# EAGLE board ERpcuk1 (EAGLE 7.7.0)
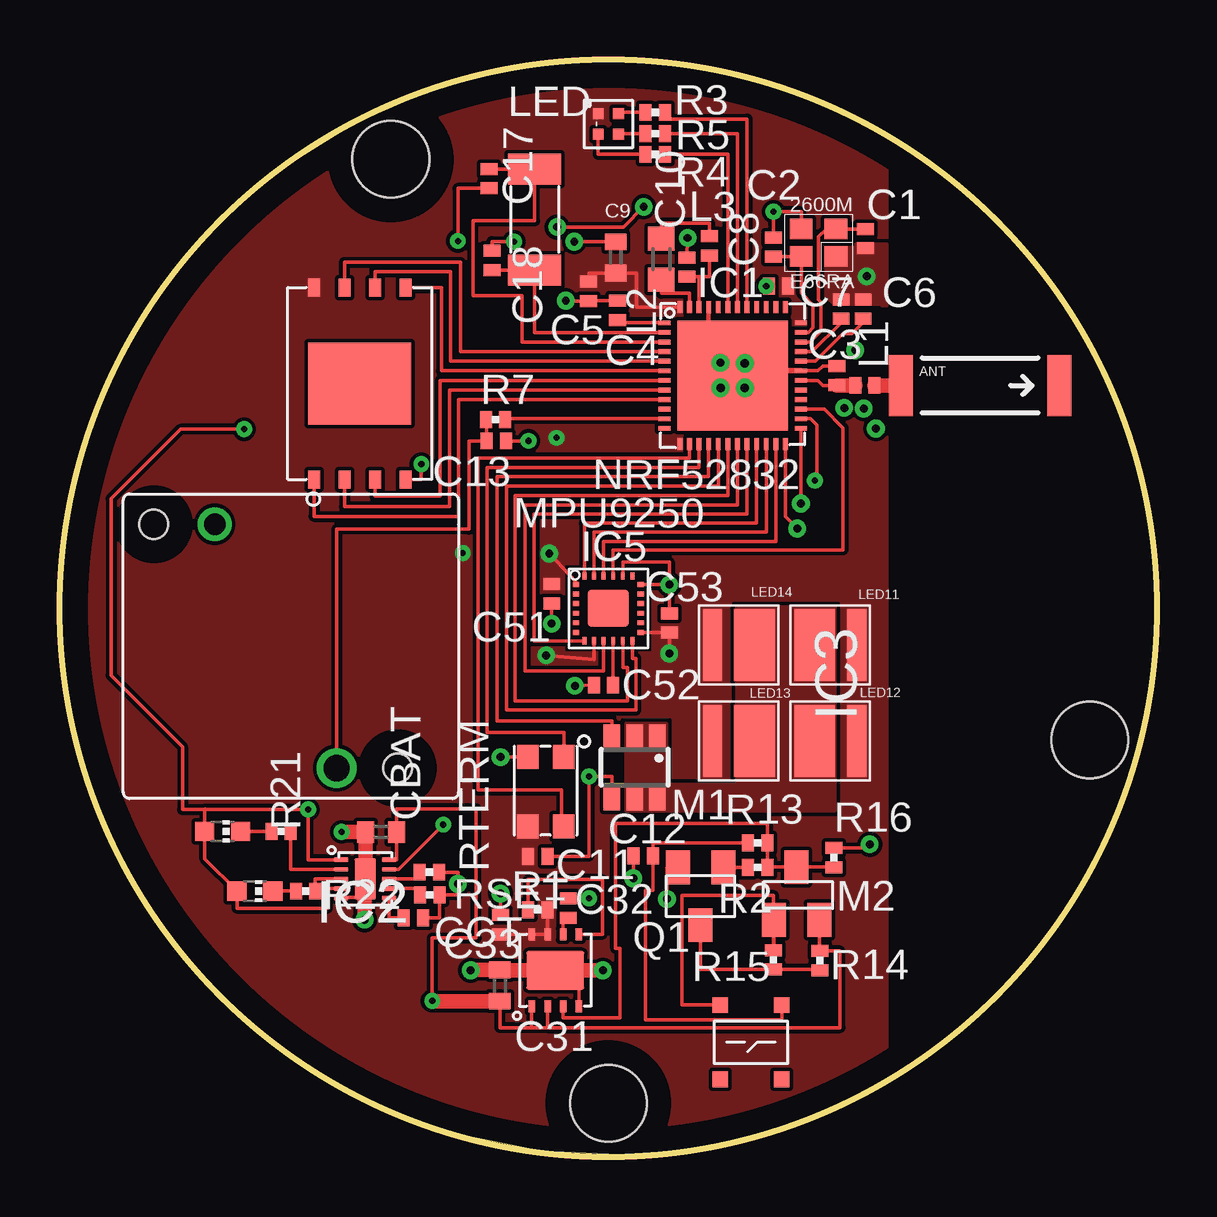
[diagram p0: board, top side]
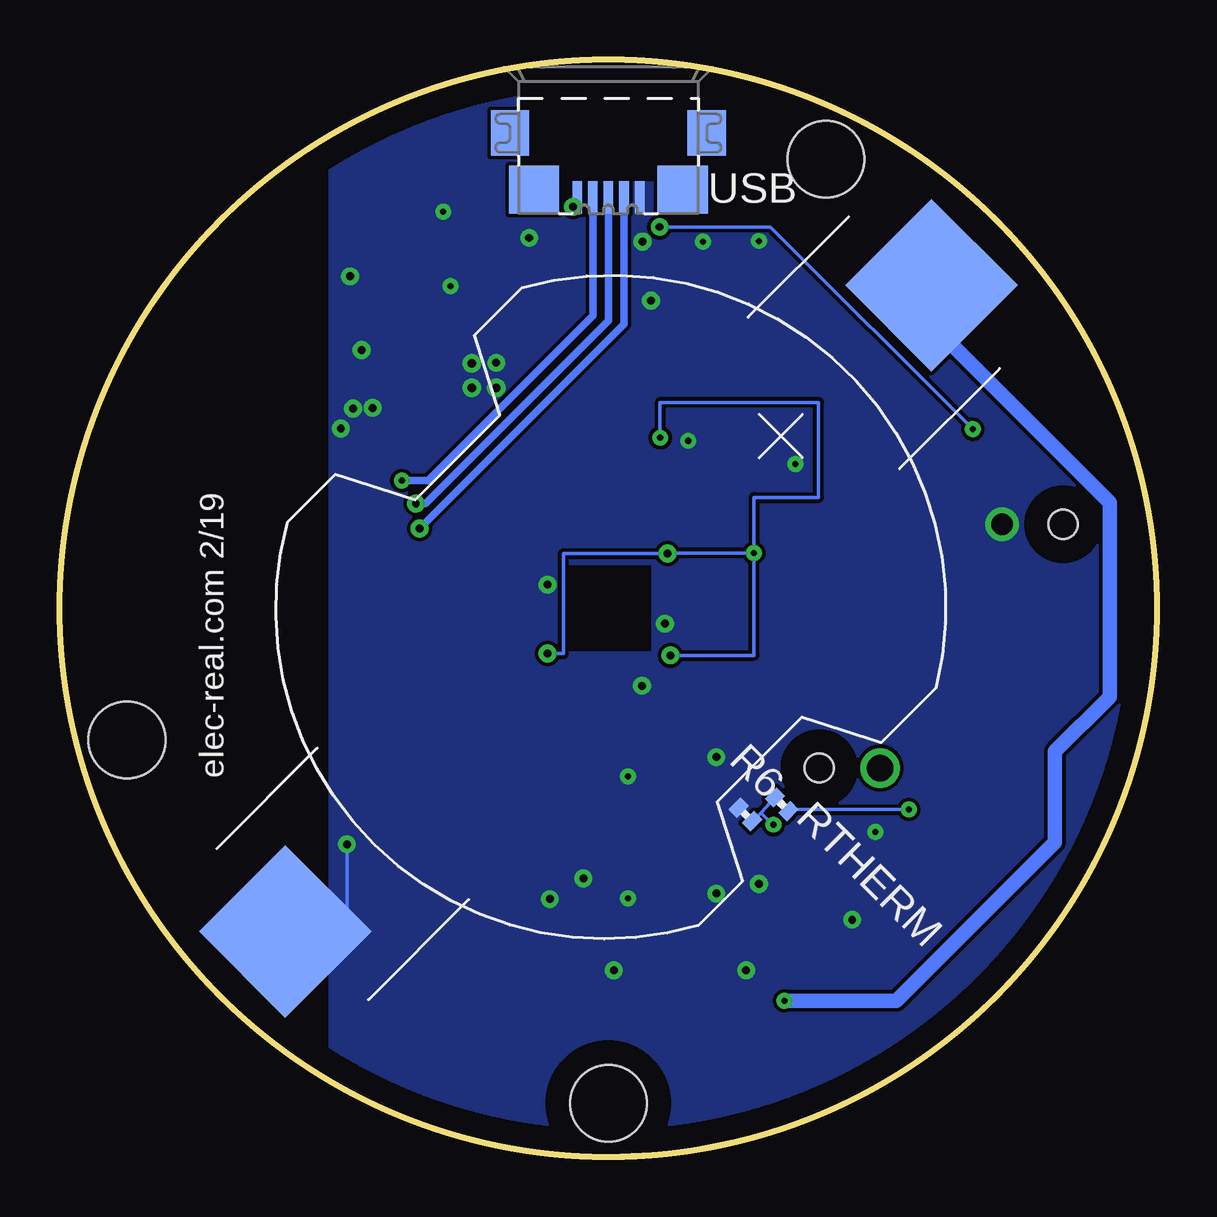
[diagram p1: board, bottom side, seen from below]

Size 45.72 x 45.72 mm. Coordinates in mm from the lower left corner, seen from the top.
Outline: circle at 22.86,22.86 radius 22.86
Copper layers (1*16): Top 0.035mm / dielectric 1.5mm / Bottom 0.035mm
Design rules "default *": minimum track width 6mil, minimum drill 10mil, track to track 6mil, track to pad 6mil, pad to pad 6mil, via to via 6mil, smd to smd 6mil, copper to edge 40mil, drill to drill 8mil, minimum pad ring 10mil, minimum via ring 8mil, stop-mask expansion 2mil, vias tented up to drill 0mil, thermal gap 10mil
Holes 3.2 mm at 13.79,41.58 42.93,17.37 22.86,2.24
Milling: 48 lines

## Footprints (pad centres in the part's own frame; a part is rotated, then mirrored left to right if it is on the bottom)
ANTENNA-CHIP5 = smd 1.016 x 2.54: FEED -3.302,0; NC 3.302,0
C0201 = smd 0.5 x 0.7: 1 -0.4,0; 2 0.4,0
C0402 = smd 0.7 x 0.9: 1 -0.65,0; 2 0.65,0
QFN48 = smd 0.5 x 0.2: 1 -2.85,2.2; 2 -2.85,1.8; 3 -2.85,1.4; 4 -2.85,1; 5 -2.85,0.6; 6 -2.85,0.2; 7 -2.85,-0.2; 8 -2.85,-0.6; 9 -2.85,-1; 10 -2.85,-1.4; 11 -2.85,-1.8; 12 -2.85,-2.2; 25 2.85,-2.2; 26 2.85,-1.8; 27 2.85,-1.4; 28 2.85,-1; 29 2.85,-0.6; 30 2.85,-0.2; 31 2.85,0.2; 32 2.85,0.6; 33 2.85,1; 34 2.85,1.4; 35 2.85,1.8; 36 2.85,2.2 | smd 0.2 x 0.5: 13 -2.2,-2.85; 14 -1.8,-2.85; 15 -1.4,-2.85; 16 -1,-2.85; 17 -0.6,-2.85; 18 -0.2,-2.85; 19 0.2,-2.85; 20 0.6,-2.85; 21 1,-2.85; 22 1.4,-2.85; 23 1.8,-2.85; 24 2.2,-2.85; 37 2.2,2.85; 38 1.8,2.85; 39 1.4,2.85; 40 1,2.85; 41 0.6,2.85; 42 0.2,2.85; 43 -0.2,2.85; 44 -0.6,2.85; 45 -1,2.85; 46 -1.4,2.85; 47 -1.8,2.85; 48 -2.2,2.85 | smd 4.6 x 4.6: 49 0,0
AAT3693 = smd 0.6 x 0.2: 1 -1,0.8; 2 -1,0.4; 3 -1,0; 4 -1,-0.4; 5 -1,-0.8; 6 1,-0.8; 7 1,-0.4; 8 1,0; 9 1,0.4; 10 1,0.8 | smd 0.9 x 1.7: EP 0,0
DFN8-3X3 = smd 0.5 x 0.3: 1 -1.5,0.975; 2 -1.5,0.325; 3 -1.5,-0.325; 4 -1.5,-0.975; 5 1.5,-0.975; 6 1.5,-0.325; 7 1.5,0.325; 8 1.5,0.975 | smd 1.6 x 2.4: EP 0,0
T4 = smd 1 x 0.9: 1 -1.45,0.75; 2 -1.45,-0.75; 3 1.45,-0.75; 4 1.45,0.75
3X3_24_QFN_CORRECTED = smd 0.3 x 0.2: 1 -1.35,1; 2 -1.35,0.6; 3 -1.35,0.2; 4 -1.35,-0.2; 5 -1.35,-0.6; 6 -1.35,-1; 13 1.35,-1; 14 1.35,-0.6; 15 1.35,-0.2; 16 1.35,0.2; 17 1.35,0.6; 18 1.35,1 | smd 0.2 x 0.3: 7 -1,-1.35; 8 -0.6,-1.35; 9 -0.2,-1.35; 10 0.2,-1.35; 11 0.6,-1.35; 12 1,-1.35; 19 1,1.35; 20 0.6,1.35; 21 0.2,1.35; 22 -0.2,1.35; 23 -0.6,1.35; 24 -1,1.35 | smd 1.7 x 1.54: P$2 0,0
R0603 = smd 1 x 1.1: 1 -0.85,0; 2 0.85,0
1X1 = smd 0.45 x 0.45: A 0.425,0.425; B -0.425,-0.425; G -0.425,0.425; R 0.425,-0.425
CHIP-LED0603 = smd 0.8 x 0.8: A 0,-0.75; C 0,0.75
XH-G = smd 1.7 x 3: 1 -0.65,0 | smd 0.8 x 3: 2 1.1,0
SSOT6 = smd 0.69 x 0.99: 1 -0.95,-1.3; 2 0,-1.3; 3 0.95,-1.3; 4 0.95,1.3; 5 0,1.3; 6 -0.95,1.3
SOT23 = smd 1 x 1.4: 1 -0.95,-1.1; 2 0.95,-1.1; 3 0,1.1
SC59-BEC = smd 1 x 1.4: B -0.95,-1.2; C 0,1.2; E 0.95,-1.2
R0201 = smd 0.5 x 0.7: 1 -0.4,0; 2 0.4,0
TL3312 = smd 0.66 x 0.635: 1 -1.549,1.28; 2 1.549,1.28; 3 -1.549,-1.28; 4 1.549,-1.28
8WSON6X8 = smd 0.75 x 0.5: 1 -4,1.905; 2 -4,0.635; 3 -4,-0.635; 4 -4,-1.905; 5 4,-1.905; 6 4,-0.635; 7 4,0.635; 8 4,1.905 | smd 3.404 x 4.293: EP 0,0
MD = drill 0.9: P$1 -5.08,-2.54 | drill 1.1: P$2 5.08,2.54 | hole 1.2: -5.08,-5.08; 5.08,5.08
LIR2450 = smd 5.08 x 5.08: 1 -19.05,0; 2 19.05,0
ZX62R-B-5P = smd 1.35 x 0.4: 1 2.675,1.3; 2 2.675,0.65; 3 2.675,0; 4 2.675,-0.65; 5 2.675,-1.3 | smd 1.9 x 1.6: M1 0,-4.1; M2 0,4.1 | smd 2 x 2.1: M3 2.35,3.1; M4 2.35,-3.1
FA-128 = smd 0.95 x 0.85: 1 -0.725,-0.575; 2 0.725,-0.575; 3 0.725,0.575; 4 -0.725,0.575
ECX39 = smd 1.3 x 2.2: P$1 -2.1,0; P$2 2.1,0

## Placement (x,y rotation side)
ANT  ANTENNA2SMD5  [ANTENNA-CHIP5]  38.35,32.16 0 top
C1  20pF  [C0201]  33.58,38.28 90 top
C2  20pF  [C0201]  29.74,37.92 270 top
C3  .8pF  [C0201]  32.38,32.56 270 top
C4  100nF  [C0201]  23.24,35.28 270 top
C5  100nF  [C0201]  22.03,36.07 90 top
C6  [C0201]  33.48,35.33 270 top
C7  100pF  [C0201]  32.56,35.33 270 top
C8  100nF  [C0201]  29.95,36.3 0 top
C9  4.7uF  [C0402]  23.16,37.49 270 top
C10  1.0uF  [C0201]  26.14,37.08 270 top
C11  0.1uF  [C0201]  19.91,12.52 180 top
C12  330nF  [C0201]  24.31,12.54 0 top
C13  [C0201]  18.19,29.84 180 top
C17  [C0201]  17.88,40.77 90 top
C18  [C0201]  18.01,37.36 270 top
C31  4.7UF  [C0402]  18.34,7.14 270 top
C32  1.0nF  [C0201]  21.18,10.36 270 top
C33  1.0uF  [C0201]  18.36,9.68 270 top
C51  10nF  [C0201]  20.5,23.47 90 top
C52  .1uF  [C0201]  22.66,19.66 0 top
C53  .1uF  [C0201]  25.4,22.25 270 top
CBAT  4.7uF  [C0402]  13.39,13.54 0 top
CCT  0.1uF  [C0201]  14.73,9.96 180 top
IC1  NRF52832  [QFN48]  28.04,32.56 0 top
IC2  AAT3693  [AAT3693]  12.73,11.58 0 top
IC3  MCP1727  [DFN8-3X3]  20.65,7.77 90 top
IC4  TSL238T  [T4]  20.24,15.21 270 top
IC5  MPU9250  [3X3_24_QFN_CORRECTED]  22.86,22.86 0 top
L1  3.9nH  [C0201]  33.55,32.16 0 top
L2  10uH  [R0603]  25.07,37.41 90 top
L3  15nH  [C0201]  27.08,37.97 270 top
LED  1X1RGB  [1X1]  22.86,43.05 90 top
LED1  [CHIP-LED0603]  6.78,13.56 270 top
LED2  [CHIP-LED0603]  8.13,11.07 270 top
LED11  XH-G  [XH-G]  32.11,21.33 0 top
LED12  XH-G  [XH-G]  32.11,17.33 0 top
LED13  XH-G  [XH-G]  28.3,17.33 180 top
LED14  XH-G  [XH-G]  28.3,21.33 180 top
M1  FDC2512  [SSOT6]  23.95,16.23 180 top
M2  BSH201  [SOT23]  30.7,10.98 0 top
Q1  SC2412  [SC59-BEC]  26.7,10.87 180 top
R1  100  [R0201]  19.91,10.29 180 top
R2  100k  [R0201]  29.08,12.06 180 top
R3  100  [R0201]  24.82,43.54 180 top
R4  100  [R0201]  24.82,41.78 180 top
R5  100  [R0201]  24.82,42.65 180 top
R6  10k  [R0201]  15.64,14.7 315 bottom
R7  R-ER0201  [R0201]  18.16,30.73 0 top
R13  1M  [R0201]  29.08,13.08 180 top
R14  10k  [R0201]  31.67,8.18 270 top
R15  10k  [R0201]  29.74,8.2 90 top
R16  10k  [R0201]  32.26,12.47 90 top
R21  1k5  [R0201]  9.22,13.56 0 top
R22  1k5  [R0201]  10.24,11.07 0 top
RSET  16k5  [R0201]  15.42,10.92 180 top
RTERM  R-ER0201  [R0201]  15.39,11.86 180 top
RTHERM  10k  [R0201]  17.15,14.27 315 bottom
SW1  TL3312  [TL3312]  28.8,4.78 270 top
U$1  W25N01GV  [8WSON6X8]  12.5,32.23 90 top
U$3  MD  [MD]  8.99,21.29 270 top
U$4  MPD-LIR2450  [LIR2450]  22.86,22.86 45 bottom
USB  Uusb  [ZX62R-B-5P]  22.86,42.67 270 bottom
X1  [FA-128]  31.62,38.1 0 top
X2  ECX32  [ECX39]  19.79,39.07 270 top

## Library data of the parts
ANT = SparkFun
C1-C13 C17 C18 C31-C33 C51-C53 CBAT CCT L1-L3 R1-R7 R13-R16 R21 R22 RSET RTERM RTHERM = rcl
IC1 = Nordic
IC2 = skyworks
IC3 = microchip
IC4 = AMS
IC5 = invensense
LED LED1 LED2 LED11-LED14 = led
M1 M2 = transistor-fet
Q1 = transistor-npn
SW1 = switch-omron; DIGIKEY: EG4620CT-ND
U$1 = st-microelectronics
U$3 = switch-omron; DIGIKEY: 401-1932-ND
U$4 = battery
USB = con-hirose
X1 = crystal; MAN: FA-128 SiekoEpson
X2 = crystal

## Nets
3V3: C5.2 C8.2 C9.2 C11.2 C33.2 C51.2 C53.2 IC1.13 IC1.36 IC1.48 IC3.7 IC3.8 IC4.3 IC5.1 IC5.8 IC5.13 LED11.2 LED12.2 LED13.2 LED14.2 LED.A R1.1 U$1.8
BLUE: IC1.42 R5.1
GND: C1.1 C2.1 C3.1 C4.1 C5.1 C6.1 C7.1 C8.1 C9.1 C10.1 C11.1 C12.1 C13.1 C17.1 C18.1 C31.1 C32.1 C33.1 C51.1 C52.1 C53.1 CBAT.1 CCT.1 IC1.31 IC1.45 IC1.49 IC2.5 IC2.EP IC3.4 IC3.EP IC4.2 IC5.18 IC5.20 M1.4 Q1.E R16.2 RSET.1 RTERM.1 RTHERM.1 U$1.4 U$3.P$1 U$4.1 USB.1 X1.2 X1.4
GREEN: IC1.43 R4.1
LT_INTENSITY: IC1.14 IC4.4
N$2: LED11.1 LED12.1 LED13.1 LED14.1 M1.1 M1.2 M1.5 M1.6
N$3: Q1.B R2.2
N$4: C3.2 IC1.30 L1.1
N$5: C6.2 IC1.32
N$6: ANT.FEED L1.2
N$7: C7.2 IC1.33
N$8: C1.2 IC1.34 X1.3
N$9: C2.2 IC1.35 X1.1
N$10: Q1.C R14.2 R15.1
N$11: IC1.47 L2.1
N$12: L2.2 L3.1
N$13: C10.2 IC1.46 L3.2
N$15: C12.2 R13.2 SW1.1
N$16: LED.B R5.2
N$17: CCT.2 IC2.6
N$18: IC2.7 RSET.2
N$19: IC2.8 RTERM.2
N$20: IC2.3 R22.2
N$21: IC2.2 R21.2
N$22: LED1.C R21.1
N$23: LED2.C R22.1
N$24: LED.G R4.2
N$25: IC3.5 R1.2
N$26: LED.R R3.2
N$27: C32.2 IC3.6
N$28: M2.1 R15.2 SW1.3
N$31: C18.2 IC1.2 X2.P$2
N$32: C17.2 IC1.3 X2.P$1
N$33: C52.2 IC5.10
N$34: C13.2 R7.1 U$3.P$2
N$36: C4.2 IC1.1
OE: IC1.15 IC4.1
P2: IC1.4 U$1.7
P3: IC1.5 U$1.6
P4: IC1.6 U$1.5
P5: IC1.7 U$1.3
P6: IC1.8 U$1.2
P7: IC1.9 U$1.1
P9: IC1.11 R7.2
P10: IC1.12
P14: IC1.17 IC5.12
P15: IC1.18 IC5.11
P16: IC1.19 IC5.9
P17: IC1.20 IC5.7
P18: IC1.21 IC5.24
P19: IC1.22 IC5.23
P20: IC1.23 IC5.22
P22: IC1.27 IC5.21
P23: IC1.28
P24: IC1.29
P25: IC1.37
P26: IC1.38
P27: IC1.39
P28: IC1.40
PWM: IC1.16 M1.3
RED: IC1.41 R3.1
RST: IC1.24 USB.2
SWDCLK: IC1.25 USB.3
SWDIO: IC1.26 USB.4
TS: IC2.9 R6.1 RTHERM.2
VBAT: C31.2 CBAT.2 IC2.10 IC3.1 IC3.2 M2.2 R14.1 U$4.2
VON: IC3.3 M2.3 R2.1 R13.1 R16.1
VUSB: IC2.1 IC2.4 LED1.A LED2.A R6.2 USB.5

## Tracks (layer width: path | path; a pad name or v marks a point on that pad's centre or on a via)
3V3  (via drill 0.25, 0.33)
  Top 0.152: R1.1 20.32,10.29 IC3.7 IC3.8 C33.2 | IC1.48 24.03,35.41 24.03,36.83 C9.2 22.05,36.84 C5.2 | IC5.1 21.51,23.96 v20.4,25.15 | v25.4,20.98 C53.2 IC5.13 | IC5.8 22.26,20.73 v20.27,20.9
  Bottom 0.152: v20.27,20.9 16.79,20.9 v16.79,25.17 | v25.4,20.98 24.74,20.98 24.74,25.15 v20.4,25.15 20.4,25.17 v16.79,25.17 | v20.7,29.97 20.7,31.45 14.1,31.45 14.1,27.48 16.79,27.48 v16.79,25.17
  pour Top (rank 2, no thermals): 0,0 45.72,0 45.72,45.72 0,45.72
BLUE
  Top 0.152: IC1.42 28.24,42.65 R5.1
GND  (via drill 0.25, 0.33, 0.34, 0.36)
  Top 0.152: IC1.31 31.59,32.76 31.8,32.97 C3.1 | IC3.4 21.62,7.77 22.1,7.77 | C33.1 v18.36,10.97 | IC2.5 11.72,10.82 12.7,10.82 | RTERM.1 16.59,11.86 v16.59,11.38 16.59,10.92 RSET.1 15.82,9.96 CCT.1 | C12.1 v23.9,11.61 | Q1.E 25.3,12.06 v25.3,10.74 | C52.1 v21.46,19.63 | C51.1 v20.5,22.23 | C53.1 v25.4,23.85 | v25.4,23.85 v25.4,23.86 | v25.4,23.85 25.4,24.79 23.46,24.79 IC5.20 | R16.2 33.6,12.87 v33.76,13.03 | C9.1 23.15,38.15 v21.44,38.15 | C4.1 C5.1 21.18,35.67 v21.08,35.69 | C10.1 v26.16,38.3 | IC5.18 v25.4,23.85 | 28.04,33.07 IC1.49 | IC4.2 v18.36,16.66 | X1.4 30.9,39.4 v29.74,39.4 C2.1 | M1.4 23,15.85 v22.05,15.85 22.05,12.52 C11.1 | C32.1 v22.05,10.77 22.02,10.74 | C8.1 v29.44,36.3 | C18.1 18.01,38.15 v18.92,38.15 | C17.1 16.59,40.37 v16.59,38.18 | U$1.4 15.06,28.23 v15.06,28.88 | C13.1 v19.53,29.84
  Top 0.178: 28.55,32.76 v28.55,33.07 28.04,33.07 | IC1.45 27.04,33.59 v27.53,33.1 | 12.7,9.84 IC2.EP
  Top 0.22: IC1.31 28.86,32.76 arc-90 v28.55,33.07
  Top 0.61: 17.14,7.79 C31.1 arc90 18.35,7.77 IC3.EP 22.1,7.77 v22.63,7.77 | 12.7,9.84 12.7,10.82 | v11.73,13.54 CBAT.1 IC2.EP
  Bottom 0.152: U$4.1 36.33,10.11 33.76,10.11 v33.76,13.03
  other vias: 27.53,32.05 28.55,32.05 17.12,7.77 12.7,9.88 33.15,33.63 33.5,31.19 34.01,30.35 32.69,31.22 33.63,36.7
  pour Bottom (no thermals): 0,0 45.72,0 45.72,45.72 0,45.72
  pour Top (no thermals): 34.26,35.48 34.47,35.48 34.47,38.05 33.17,38.05 33.17,37.97 33.17,37.9 31.93,37.9 31.93,35.86 32.26,35.53 34.21,35.53
GREEN
  Top 0.152: IC1.43 27.84,41.78 R4.1
LT_INTENSITY
  Top 0.152: IC1.14 26.24,29.13 17.42,29.13 17.42,15.29 20.9,15.29 20.9,13.77 IC4.4
N$1
  cutout Top: 47.5,41.15 47.5,4.57 34.54,4.57 34.54,41.15
N$2
  pour Top (no thermals): 23.6,18.03 23.6,14.43 31.6,14.43 32.31,14.43 32.31,22.91 28.22,22.91 28.22,15.52 25.27,15.52 25.27,17.98 25.27,18.06 23.6,18.06
N$3
  Top 0.152: Q1.B | Q1.B R2.2
N$4
  Top 0.152: IC1.30 31.59,32.36 31.8,32.16 C3.2
  Top 0.61: C3.2 L1.1
N$5
  Top 0.152: IC1.32 31.49,33.16 32.64,34.31 33.02,34.31 33.48,34.77 C6.2
N$6
  Top 0.61: L1.2 ANT.FEED
N$7
  Top 0.152: IC1.33 31.35,33.56 32.56,34.77 C7.2
N$8
  Top 0.152: IC1.34 31.27,33.96 31.73,34.42 31.73,35.64 31.62,35.74 31.62,38.35 31.94,38.67 X1.3 C1.2
N$9
  Top 0.152: IC1.35 31.19,34.36 31.39,34.57 31.39,35.51 30.91,35.99 30.91,37.51 X1.1 C2.2
N$10
  Top 0.152: R14.2 31.67,7.8 R15.1 26.7,7.8 Q1.C
N$11
  Top 0.152: IC1.47 26.24,35.99 25.07,35.99 L2.1
N$12
  Top 0.152: L3.1 27.08,38.91 25.07,38.91 L2.2
N$13
  Top 0.152: IC1.46 26.64,36.68 | 26.64,36.68 C10.2 | L3.2 27.08,36.68 26.64,36.68
N$14
  cutout Bottom: 47.5,41.15 47.5,4.57 34.54,4.57 34.54,41.15
N$15
  Top 0.152: R13.2 24.71,13.08 C12.2 24.71,11.1 24.41,11.1 24.41,5.71 24.71,5.71 25.07,5.71 30.08,5.71 SW1.1
N$16
  Top 0.152: LED.B 23.29,42.65 R5.2
N$17
  Top 0.152: IC2.6 13.72,9.96 CCT.2
N$18
  Top 0.152: IC2.7 14.99,11.18 RSET.2
N$19
  Top 0.152: IC2.8 14.99,11.58 RTERM.2
N$20
  Top 0.152: IC2.3 10.64,11.58 R22.2
N$21
  Top 0.152: IC2.2 9.62,11.98 R21.2
N$22
  Top 0.152: R21.1 LED1.C
N$23
  Top 0.152: R22.1 LED2.C
N$24
  Top 0.152: LED.G 22.43,41.78 R4.2
  Top 0.178: LED.G 22.42,42.63
N$25
  Top 0.152: IC3.5 22.61,9.27 22.61,11.56 19.51,11.56 R1.2
N$26
  Top 0.152: LED.R 23.34,43.54 R3.2
N$27
  Top 0.152: IC3.6 20.98,9.96 C32.2
N$28
  Top 0.152: M2.1 29.75,8.6 R15.2 29.74,10.9 25.93,10.9 25.93,6.33 SW1.3
N$29
  cutout Top: 21.08,24.64 24.64,24.64 24.64,21.08 21.08,21.08
N$30
  cutout Bottom: 21.08,24.64 24.64,24.64 24.64,21.08 21.08,21.08
N$31
  Top 0.152: IC1.2 19.79,34.36 X2.P$2 C18.2
N$32
  Top 0.152: IC1.3 19.25,33.96 19.25,35.89 17.22,35.89 17.22,39.01 19.79,39.01 X2.P$1 C17.2
N$33
  Top 0.152: C52.2 23.06,20.47 IC5.10
N$34
  Top 0.152: R7.1 17.79,30.73 C13.2 17.04,29.84 17.04,26.16 11.53,26.16 U$3.P$2
N$36
  Top 0.152: IC1.1 23.24,34.76 C4.2
OE
  Top 0.152: IC1.15 26.64,28.73 17.8,28.73 17.8,17.68 21.01,17.68 21.01,16.66 IC4.1
P2
  Top 0.152: U$1.7 11.86,37.29 16.69,37.29 16.69,33.56 IC1.4
P3
  Top 0.152: U$1.6 13.13,36.91 16.28,36.91 16.28,33.16 IC1.5
P4
  Top 0.152: U$1.5 15.9,36.23 15.9,32.76 IC1.6
P5
  Top 0.152: U$1.3 13.13,27.53 15.85,27.53 15.85,32.36 IC1.7
P6
  Top 0.152: U$1.2 11.86,27.1 16.23,27.1 16.23,31.96 IC1.8
P7
  Top 0.152: U$1.1 10.59,26.7 16.61,26.7 16.61,31.56 IC1.9
P9
  Top 0.152: IC1.11 18.56,30.76 R7.2
P14
  Top 0.152: IC1.17 27.44,27.96 18.62,27.96 18.62,18.62 24,18.62 24,20.78 23.86,20.78 IC5.12
P15
  Top 0.152: IC1.18 27.84,27.56 18.97,27.56 18.97,19 23.65,19 23.65,20.4 23.46,20.4 IC5.11
P16
  Top 0.152: IC1.19 28.24,27.18 19.38,27.18 19.38,20.24 22.66,20.24 22.66,20.25 IC5.9
P17
  Top 0.152: IC1.20 28.64,26.8 19.76,26.8 19.76,21.51 IC5.7
P18
  Top 0.152: IC1.21 29.04,26.42 21.86,26.42 IC5.24
P19
  Top 0.152: IC1.22 29.44,26.04 22.26,26.04 IC5.23
P20
  Top 0.152: IC1.23 29.84,25.65 22.66,25.65 IC5.22
P22
  Top 0.152: IC1.27 31.86,31.16 32.64,30.38 32.64,25.3 23.06,25.3 IC5.21
PWM
  Top 0.152: IC1.16 27.04,28.35 18.21,28.35 18.21,18.16 23,18.16 M1.3
RED
  Top 0.152: R3.1 25.5,43.26 28.64,43.26 IC1.41
RST  (via drill 0.33)
  Top 0.152: v30.73,26.19 30.24,26.68 IC1.24
  Top 0.178: 30.25,29.7 IC1.24
  Bottom 0.305: USB.2 22.21,34.71 v30.73,26.19
SWDCLK  (via drill 0.33)
  Top 0.152: v30.89,27.23 IC1.25
  Bottom 0.305: USB.3 22.86,34.85 30.48,27.23 v30.89,27.23
SWDIO  (via drill 0.25)
  Top 0.152: IC1.26 31.29,30.76 31.55,30.5 31.55,28.3 v31.47,28.19
  Bottom 0.305: USB.4 23.51,35.06 30.38,28.19 v31.47,28.19
TS  (via drill 0.25)
  Top 0.152: IC2.9 14.12,11.98 v15.98,13.84
  Bottom 0.152: RTHERM.2 16.5,14.35 | 16.5,14.35 R6.1 | v15.98,13.84 16,13.84 16.5,14.35
VBAT  (via drill 0.25)
  Top 0.152: IC3.2 20.32,5.38 | 20.32,5.38 19.66,5.38 | 19.66,5.38 18.34,5.38 C31.2 | IC3.1 19.66,6.27 19.66,5.38 | IC2.10 14.04,12.38 CBAT.2 14.04,14.5 17.35,14.5 17.35,9.12 15.52,9.12 v15.52,6.5 | M2.2 31.66,8.6 R14.1 32.51,8.58 32.51,5.38 20.32,5.38
  Top 0.61: v15.52,6.5 15.53,6.49 C31.2
  Bottom 0.61: U$4.2 9.39,34.71 1.96,27.28 1.96,19.18 4.24,16.89 4.24,13.11 10.85,6.5 v15.52,6.5
VON
  Top 0.152: R16.1 M2.3 29.48,12.07 R2.1 R13.1 29.48,13.89 23.16,13.89 23.16,8.69 23.34,8.69 23.34,5.79 20.98,5.79 IC3.3
VUSB  (via drill 0.25, 0.33)
  Top 0.152: v20.73,38.76 23.5,38.76 v24.33,39.6 | IC2.1 10.34,12.38 v10.34,14.48 6.03,14.48 | 6.03,14.48 LED1.A 6.03,12.42 LED2.A 7.38,10.36 11.15,10.36 11.15,11.18 IC2.4 | 6.04,14.49 6.03,14.48 | v7.67,30.33 5.03,30.33 2.13,27.43 2.13,20.07 5.11,17.09 5.11,14.48 6.03,14.48
  Bottom 0.152: v20.73,38.76 16.1,38.76 v7.67,30.33 | R6.2 15.29,14.48 v10.34,14.48
  Bottom 0.305: USB.5 24.18,40.36 24.18,39.75 v24.33,39.6

## Text on the board
tPlace: IC3 | IC2
bPlace: elec-real.com 2/19